# Altium PCB GRAVITAS_XTREME_SENSOR.PcbDoc
Units mil, origin at the board's own origin, x right, y up, seen from the top; angles counter-clockwise.
Board outline 1575 x 5595 mil, 4 copper layers (Top Layer, Layer 1, Layer 2, Bottom Layer), stack 23.756 mil thick; 62 components, 34 nets, 225 pads, 90 vias.
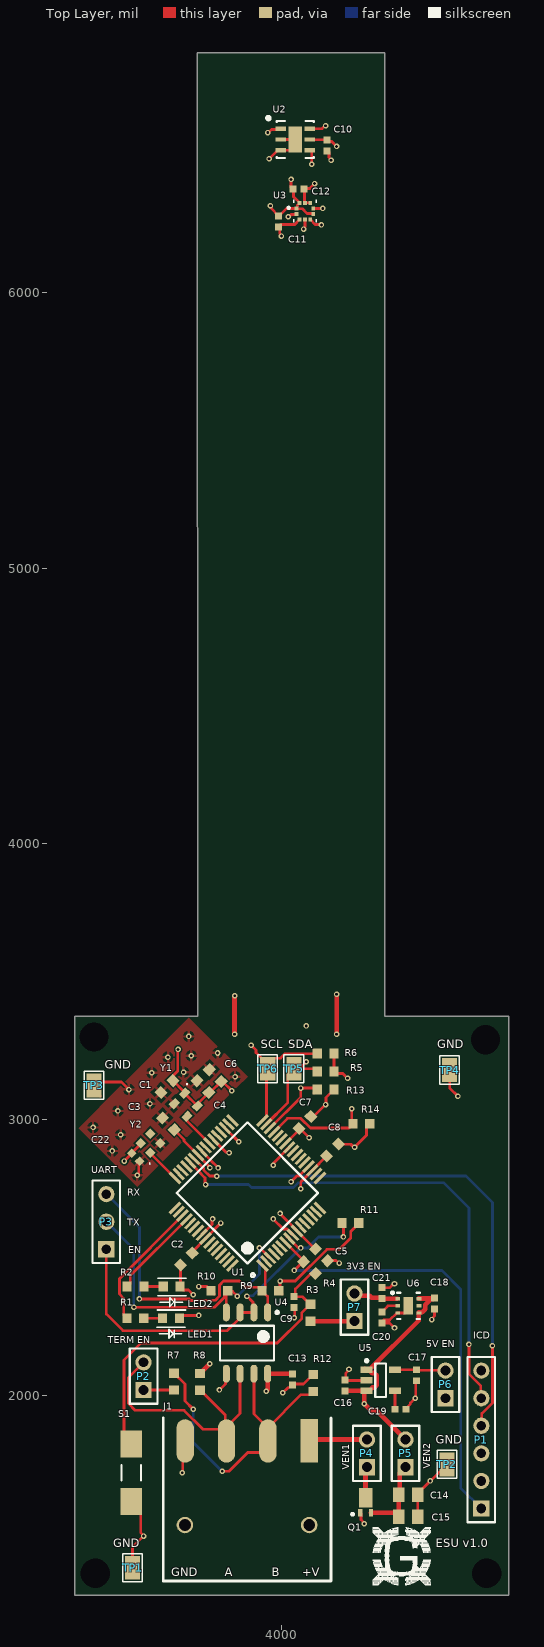
[diagram p0: Top Layer view]
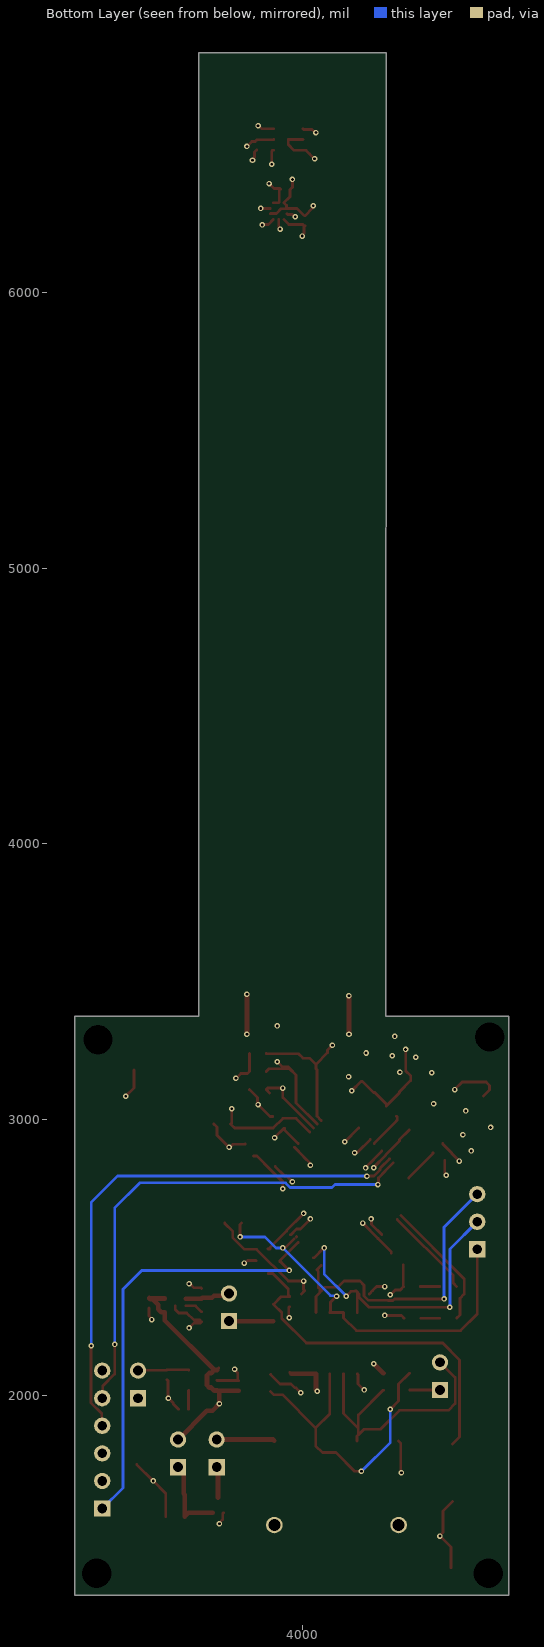
[diagram p1: Bottom Layer view, seen from below]
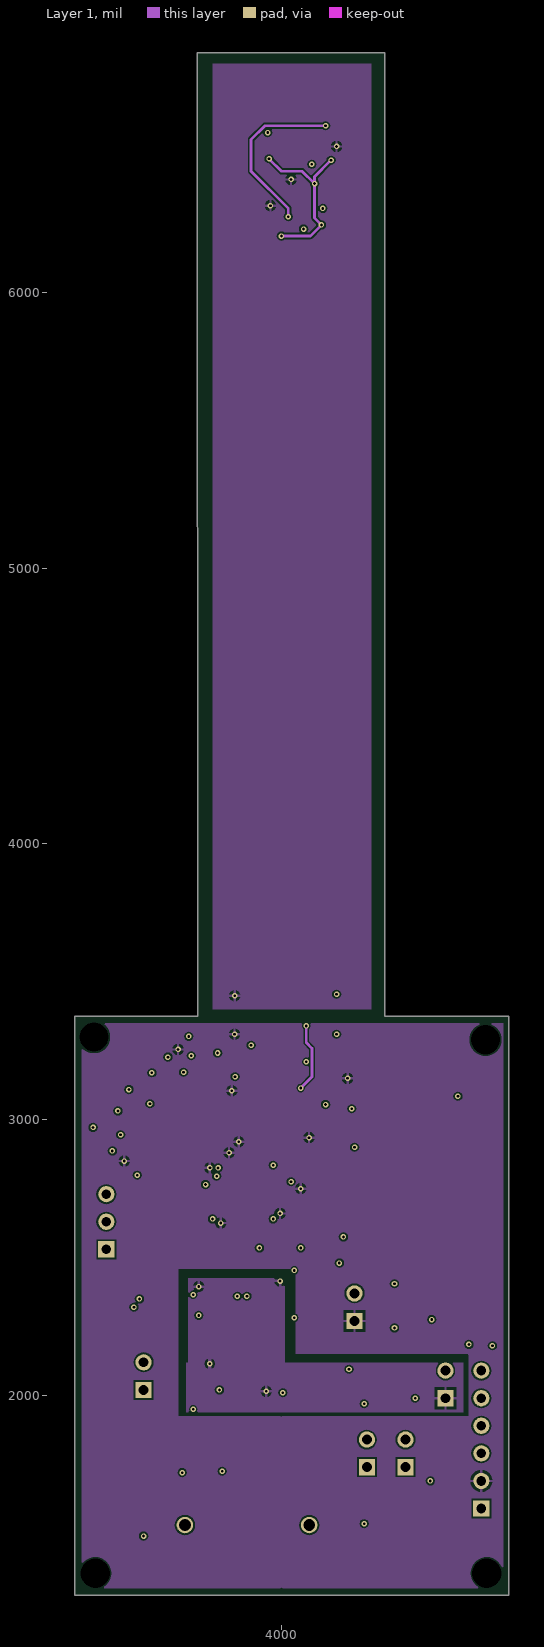
[diagram p2: Layer 1]
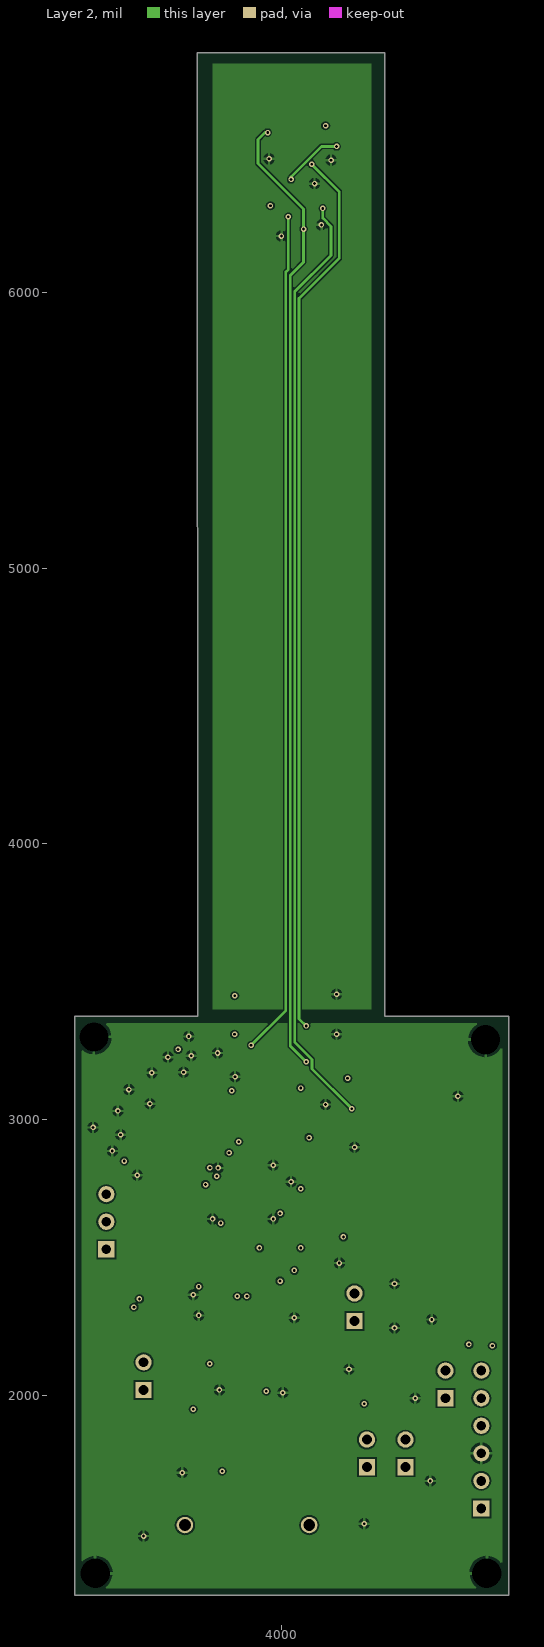
[diagram p3: Layer 2]

## Layer stack, top to bottom
Top Solder: solder mask 0.4, Solder Resist, Dk 3.5
Top Layer: signal copper 1.4
Dielectric 2: prepreg 2.8, PP-006, Dk 4.1
Layer 1: signal copper 1.3779
Dielectric 1: dielectric 12.6, FR-4, Dk 4.8
Layer 2: signal copper 1.3779
Dielectric 3: prepreg 2.8, PP-006, Dk 4.1
Bottom Layer: signal copper 1.4
Bottom Solder: solder mask 0.4, Solder Resist, Dk 3.5

## Board outline
3250,1275 3250,3375 3696.96,3375 3696.96,3426.96 3695,6870 4375,6870 4375,3420 4375,3375 4825,3375 4825,1275

## Design rules (kind name [scope] priority, off if disabled: settings)
Clearance [All] p1: gap=6 ignorepadtopadclearanceinfootprint=FALSE except(0: Arc-Hole Track-Hole SMDPad-Hole THPad-Hole Via-Hole Fill-Hole Poly-Hole Region-Hole Text-Hole; 4: SMDPad-SMDPad)
PolygonConnect [All] p1: connectstyle=Relief reliefconductorwidth=10 reliefentries=4 polygonreliefangle="90 Angle" airgapwidth=10
RoutingVias [All] p1: holewidth=10 width=20 viastyle="Through Hole" minholewidth=10 minwidth=20 maxholewidth=50 maxwidth=60
SolderMaskExpansion [All] p1: expansion=4
Width [All] p1: maxlimit=17 minlimit=6 preferedwidth=10 midlayer1_minwidth=10 midlayer1_maxwidth=10 midlayer2_minwidth=10 midlayer2_maxwidth=10 minimp=50.000000 maximp=50.000000 favimp=50.000000
30 further rules are at their usual default settings.

## Classes and differential pairs
component class VREG_RS485_XS: C13 C14 C15 C16 C17 C18 C19 C20 C21 J1 P2 P3 P4 P5 P6 P7 Q1 R7 R8 R9 R10 R11 R12 TP1 TP2 TP3 TP4 U4 U5 U6
component class SENSORS_XS: C10 C11 C12 R5 R6 R13 R14 TP5 TP6 U1 U2 U3
component class MCU_SUPPORT_XS: C1 C2 C3 C4 C5 C6 C7 C8 C9 C22 LED1 LED2 P1 R1 R2 R3 R4 S1 Y1 Y2

## Components (designator, comment, footprint, x,y, rotation, side; value= is the part's Value field where it differs from the comment)
C1 "0.1uF" NonPolar-0603 3585,3120 r45 top
C2 "0.1uF" NonPolar-0603 3655,2495 r45 top
C3 "0.1uF" NonPolar-0603 3590,2985 r315 top
C4 "0.1uF" NonPolar-0603 3715,3120 r315 top
C5 "0.1uF" NonPolar-0603 4145,2510 r135 top
C6 "0.1uF" NonPolar-0603 3760,3160 r315 top
C7 "0.1uF" NonPolar-0603 4085,2990 r225 top
C8 "0.1uF" NonPolar-0603 4185,2890 r225 top
C9 "100nF" NonPolar-0402 4045,2340 r90 top
C10 "0.1uF" NonPolar-0402 4165,6535 r90 top
C11 "100nF" NonPolar-0402 3990,6260 r90 top
C12 "100nF" NonPolar-0402 4060,6375 r180 top
C13 "0.1uF" NonPolar-0402 4040,2060 r90 top
C14 "10uF" NonPolar-0805 4460,1640 r180 top
C15 "10uF" NonPolar-0805 4460,1560 r180 top
C16 "1uF" NonPolar-0402 4230,2035 r270 top
C17 "4.7uF" NonPolar-0402 4490,2075 r90 top
C18 "1uF" NonPolar-0402 4555,2335 r90 top
C19 "10nF" NonPolar-0402 4430,1950 r180 top
C20 "0.01uF" NonPolar-0402 4365,2285 r90 top
C21 "2.2uF" NonPolar-0402 4365,2370 r270 top
C22 "0.1uF" NonPolar-0402 3470,2865 r135 top
J1 "1824653" 1824653 4100.79,1835.12 r180 top
LED1 "LED-0603" LED-0603 3597.52,2280 r0 top
LED2 "LED-0603" LED-0603 3600,2395 r0 top
P1 "Header 6" HDR1X6 4725,1590 r90 top
P2 "Header 2" HDR1X2 3500,2020 r90 top
P3 "Header 3" HDR1X3 3365,2530 r90 top
P4 "Header 2" HDR1X2 4310,1740 r90 top
P5 "Header 2" HDR1X2 4450,1740 r90 top
P6 "Header 2" HDR1X2 4595,1990 r90 top
P7 "Header 2" HDR1X2 4265,2270 r90 top
Q1 "P_Channel_DMG3415UFY4Q-7" P_Channel_DMG3415UFY4Q-7_attempt1 4305,1610 r90 top
R1 "220R" NonPolar-0603 3470,2280 r0 top
R2 "220R" NonPolar-0603 3470.51,2395 r0 top
R3 "10k" NonPolar-0603 4105,2300 r270 top
R4 "220R" NonPolar-0603 4101.58,2463.42 r315 top
R5 "5k" NonPolar-0603 4160.51,3175 r0 top
R6 "5k" NonPolar-0603 4160.51,3240 r0 top
R7 "120R" NonPolar-0603 3610,2050 r90 top
R8 "20k" NonPolar-0603 3705,2049.49 r90 top
R9 "10k" NonPolar-0603 3960,2380 r0 top
R10 "10k" NonPolar-0603 3775,2380 r180 top
R11 "10k" NonPolar-0603 4250,2625 r0 top
R12 "20k" NonPolar-0603 4115,2045 r270 top
R13 "10k" NonPolar-0603 4160.51,3110 r180 top
R14 "10k" NonPolar-0603 4290,2985 r180 top
S1 "Switch-147873-1" "Switch - 147873-1" 3455,1719.33 r270 top
TP1 "TestPoint" "TP - S2751-46R" 3460,1375 r90 top
TP2 "TestPoint" "TP - S2751-46R" 4600,1750 r90 top
TP3 "TestPoint" "TP - S2751-46R" 3320,3124.25 r90 top
TP4 "TestPoint" "TP - S2751-46R" 4610,3180 r90 top
TP5 "TestPoint" "TP - S2751-46R" 4045,3185 r90 top
TP6 "TestPoint" "TP - S2751-46R" 3950,3185 r90 top
U1 "PIC32MK0512GPD064-I/PTX" V2_PIC32MK0512GPD064IPT 3876.59,2734.36 r135 top
U2 "HDC2080" HDC2080 4050,6555 r0 top
U3 "BMP388" BMP388 4085.12,6295.16 r0 top
U4 "MAX485CSA+" MAXM-MAX485CSA+-8_M 3875,2190 r270 top
U5 "5V_LDO_LP2992IM5-5.0/NOPB" LP2992IM5-5.0/NOPB 4360,2055 r0 top
U6 "3V3_LDO_TPS73533" TPS73533DRVT 4460,2325 r0 top
Y1 "12MHz_DSC1001DE2-012.0000" 12MHz_DSC1001DE2-012.0000 3653.24,3054.18 r315 top
Y2 "32.768kHz_DSC6083JE2A-032K768" 32.768kHz_DSC6083JE2A-032K768 3586.25,2918.97 r45 top

## Footprints (in the part's own frame and the unit in brackets; to place one, negate y for a bottom-side part, rotate by r counter-clockwise, add the part's x,y. Pads: shape width x height; smd on the part's side, far side on the other; paste and mask are expansions set on the pad)
12MHz_DSC1001DE2-012.0000 [mm]
  rect 0.65x0.85 smd: 1(-0.825,0.675) 2(-0.825,-0.675) 3(0.825,-0.675) 4(0.825,0.675)
  silkscreen extent -1.32,1.38 -1.23,1.47, body extent -1.28,-1.02 1.27,1.03, height 0.9
32.768kHz_DSC6083JE2A-032K768 [mm]
  rect 0.7x0.7 smd: 1(-1.8,0.4) 2(-0.55,0.4) 3(-0.55,1.65) 4(-1.8,1.65)
  silkscreen extent -2.59,-0.3 -2.49,-0.2, body extent -2.42,0.02 0.08,2.02, height 0.89
1824653 [mm]
  rect 1.6x4 smd: 1(0,0)
  oval 1.6x4 smd: 2(3.81,0) 3(7.62,0) 4(11.43,0)
  round 1.524 hole 1.1: 5(0,7.75) 6(11.45,7.75)
  silkscreen extent -2,-2.1 13.45,12.9, body extent -1.98,-2.21 13.45,12.96, height 7.7
BMP388 [mm]
  rect 0.35x0.38 smd: 1(-0.765,0.25) 2(-0.765,-0.25) 3(-0.5,-0.765) 4(0,-0.765) 5(0.5,-0.765) 6(0.765,-0.25) 7(0.765,0.25) 8(0.5,0.765) 9(0,0.765) 10(-0.5,0.765)
  silkscreen extent -1.6,-1.03 1.03,1.03
HDC2080 [mm] "SON, 6-Leads, Body 3.00x3.00mm, Pitch 1.00mm, Thermal Pad 2.40x1.28mm, IPC Medium Density"
  rect 1x0.4 smd: 1(-1.34,1) 2(-1.34,0) 3(-1.34,-1) 4(1.34,-1) 5(1.34,0) 6(1.34,1)
  rect 1.28x2.4 smd: 7(0,0)
  silkscreen extent -2.67,-1.7 1.7,2.17, body extent -1.55,-1.55 1.55,1.55, height 0.8
HDR1X2 [mm] "Connector; Header; 2 Position"
  rect 1.5x1.5 hole 0.9: 1(0,0)
  round 1.5 hole 0.9: 2(2.54,0)
  silkscreen extent -1.27,-1.27 3.81,1.27
HDR1X3 [mm] "Connector; Header; 3 Position"
  rect 1.5x1.5 hole 0.9: 1(0,0)
  round 1.5 hole 0.9: 2(2.54,0) 3(5.08,0)
  silkscreen extent -1.27,-1.27 6.35,1.27
HDR1X6 [mm] "Connector; Header; 6 Position"
  rect 1.5x1.5 hole 0.9: 1(0,0)
  round 1.5 hole 0.9: 2(2.54,0) 3(5.08,0) 4(7.62,0) 5(10.16,0) 6(12.7,0)
  silkscreen extent -1.27,-1.27 13.97,1.27
LED-0603 [mm]
  rect 0.85x0.9 smd: 1(-0.725,0) 2(0.825,0)
  silkscreen extent -1.24,-1.84 1.39,0.76, body extent -0.8,-0.45 0.9,0.45, height 0.6
LP2992IM5-5.0/NOPB [mm]
  rect 1.1x0.6 smd: 1(-1.3,0.95) 2(-1.3,0) 3(-1.3,-0.95) 4(1.3,-0.95) 5(1.3,0.95)
  silkscreen extent -1.42,-1.55 0.5,1.92, body extent -0.87,-1.52 0.87,1.53, height 1.45
MAXM-MAX485CSA+-8_M [mm] "SOIC, 8-Leads, Body 5x4mm, Pitch 1.27mm, IPC Low Density"
  oval 1.65x0.65 smd: 1(-2.825,1.905) 2(-2.825,0.635) 3(-2.825,-0.635) 4(-2.825,-1.905) 5(2.825,-1.905) 6(2.825,-0.635) 7(2.825,0.635) 8(2.825,1.905)
  silkscreen extent -2.95,-2.5 1.6,2.91, body extent -2,-2.5 2,2.5, height 1.75
NonPolar-0402 [mm]
  rect 0.64x0.64 smd: 1(-0.55,0) 2(0.46,0)
  body extent -0.55,-0.3 0.55,0.3, height 0.7
NonPolar-0603 [mm] "Chip Resistor, 2-Leads, Body 1.60x0.80mm, IPC Medium Density"
  rect 0.85x0.9 smd: 1(-0.775,0) 2(0.775,0)
  body extent -0.85,-0.45 0.85,0.45, height 0.6
NonPolar-0805 [mm] "Chip Resistor, 2-Leads, Body 2.00x1.20mm, IPC Medium Density"
  rect 1.05x1.3 smd: 1(-0.875,0) 2(0.875,0)
  body extent -1.05,-0.65 1.05,0.65, height 0.6
P_Channel_DMG3415UFY4Q-7_attempt1 [mm] "DFN, 3-Leads, Body 1.51x2.01mm, Pitch 1.40mm, IPC Medium Density"
  rect 0.65x0.4 smd: 1(-0.9,0.5) 2(-0.9,-0.5)
  rect 1.8x1.25 smd: 3(0.5,0)
  silkscreen extent -1.18,1.01 -0.91,1.32, body extent -1.04,-0.79 1.04,0.79, height 0.4
"Switch - 147873-1" [mm]
  rect 2.5x2 smd: 1(-2.65,0) 2(2.65,0)
  silkscreen extent -0.7,-0.9 0.7,0.9, body extent -3.8,-1.05 3.8,1.05, height 3
"TP - S2751-46R" [mm]
  rect 2.2x1.4 smd: 1(0,0)
  silkscreen extent -1.29,-0.89 1.3,0.91, body extent -1,-0.6 1,0.6, height 1.4
TPS73533DRVT [mm]
  rect 0.45x0.3 smd: 1(-0.975,0.65) 2(-0.975,0) 3(-0.975,-0.65) 4(0.975,-0.65) 5(0.975,0) 6(0.975,0.65)
  rect 0.89x1.6 smd: 7(0,0)
  silkscreen extent -1.58,-1.2 1.05,1.33, body extent -1.05,-1.05 1.05,1.05, height 0.8
V2_PIC32MK0512GPD064IPT [mm]
  rect 1.4x0.3 smd: 1(-5.7,3.75) 2(-5.7,3.25) 3(-5.7,2.75) 4(-5.7,2.25) 5(-5.7,1.75) 6(-5.7,1.25) 7(-5.7,0.75) 8(-5.7,0.25) 9(-5.7,-0.25) 10(-5.7,-0.75) 11(-5.7,-1.25) 12(-5.7,-1.75) 13(-5.7,-2.25) 14(-5.7,-2.75) 15(-5.7,-3.25) 16(-5.7,-3.75) 33(5.7,-3.75) 34(5.7,-3.25) 35(5.7,-2.75) 36(5.7,-2.25) 37(5.7,-1.75) 38(5.7,-1.25) 39(5.7,-0.75) 40(5.7,-0.25) 41(5.7,0.25) 42(5.7,0.75) 43(5.7,1.25) 44(5.7,1.75) 45(5.7,2.25) 46(5.7,2.75) 47(5.7,3.25) 48(5.7,3.75)
  rect 0.3x1.4 smd: 17(-3.75,-5.7) 18(-3.25,-5.7) 19(-2.75,-5.7) 20(-2.25,-5.7) 21(-1.75,-5.7) 22(-1.25,-5.7) 23(-0.75,-5.7) 24(-0.25,-5.7) 25(0.25,-5.7) 26(0.75,-5.7) 27(1.25,-5.7) 28(1.75,-5.7) 29(2.25,-5.7) 30(2.75,-5.7) 31(3.25,-5.7) 32(3.75,-5.7) 49(3.75,5.7) 50(3.25,5.7) 51(2.75,5.7) 52(2.25,5.7) 53(1.75,5.7) 54(1.25,5.7) 55(0.75,5.7) 56(0.25,5.7) 57(-0.25,5.7) 58(-0.75,5.7) 59(-1.25,5.7) 60(-1.75,5.7) 61(-2.25,5.7) 62(-2.75,5.7) 63(-3.25,5.7) 64(-3.75,5.7)
  silkscreen extent -5.85,-4.6 4.6,5.15, body extent -5,-5 5,5, height 1

## Part data
C1 C2 C3 C4 C5 C6 C7 C8: library part "Cap - 0603"
C9 C10 C11 C12 C13 C16 C17 C18 C19 C20 C21 C22: library part "Cap - 0402"
C14 C15: library part "Cap - 0805"
P1: "Header, 6-Pin", LatestRevisionDate=17-Jul-2002, LatestRevisionNote="Re-released for DXP Platform.", Publisher="Altium Limited"
P2 P4 P5 P6 P7: "Header, 2-Pin", LatestRevisionDate=17-Jul-2002, LatestRevisionNote="Re-released for DXP Platform.", Publisher="Altium Limited"
P3: "Header, 3-Pin", LatestRevisionDate=17-Jul-2002, LatestRevisionNote="Re-released for DXP Platform.", Publisher="Altium Limited"
R1 R2 R3 R4 R5 R6 R7 R8 R9 R10 R11 R12 R13 R14: library part "Res - 0603"
TP1 TP2 TP3 TP4 TP5 TP6: "S2751-46R"
U4: library part CMP-2000-05211-1, "Low-Power, Slew-Rate-Limited RS-485/RS-422 Transceiver, 4.75 to 5.25 V, 0 to 70 degC, 8-Pin SOIC, RoHS, Tape and Reel", Digital IC Case Style=SOIC, IC Temperature Range=Commercial, Manufacturer=Maxim, Operating Temperature Max=70degC, Operating Temperature Min=0degC, Operating Temperature Range=0degCto+70degC, Supply Current=500µA, Supply Voltage Max=5.25V, Supply Voltage Min=4.75V, Supply Voltage Range=4.75Vto5.25V, Base Number=485, Data Rate=2.5Mbps, Datasheet URL=https://datasheet.ciiva.com/29306/170071-da-01-en-ic-max485csa-so8-29306144.pdf, Datasheet Version="Rev. 8, 10/2003", Device Marking=MAX485CSA+, Device Type=Transceiver, Driver Case Style=SOIC, IC Generic Number=485, Interface=RS-422/RS-485, Interface Type=RS422,RS485, Line / Bus Driver / Receiver / Transceiver Type=CMOSDifferential, Logic Function Number=485, Manufacturer URL=http://www.maximintegrated.com/, No. of Drivers=1, No. of Pins=8, No. of Receivers=1, Package / Case=SOIC, Transceiver Type=Differential

## Free pads (board coordinates)
  round 60 hole 106.3: 8(3320,3300) 9(4740,3290) 10(4745,1355) 11(3325,1355)

## Via types
v1: diameter 20, hole 10, Top Layer to Bottom Layer, 90 vias

## Nets (pads, with @x,y where several pads share a name; then routed paths per layer and width w, separated by ;. In a path a pad name is that pad's centre, name@x,y a point inside that pad or via, vN(x,y) a via of type N, cw(c..) or ccw(c..) an arc to the next point about the centre after c; other vN are vias at no path point)
3V3DC: C1.2 C2.2 C3.2 C4.2 C5.2 C6.2 C7.2 C8.2 C10.2 C11.2 C12.2 C22.2 P1.2 P7.1 R3.2 R5.2 R6.2 U1.10 U1.19 U1.26 U1.35 U1.38 U1.42 U1.57 U2.5 U3.1 U3.6 U3.10 Y1.1 Y1.4 Y2.4 | length 2588.2
  Top Layer w10: v1(3430,2850) 3457.19,2877.19 C22.2 3457.19,2879.8 3490.2,2912.81 Y2.4 ; C3.2 3646.47,2928.53 3646.47,2922.73 U1.42 3697.03,2870.88 3740.42,2827.49 v1(3740.42,2825.42) ; v1(3625,3255) 3624.07,3254.07 3624.07,3177.06 3605.88,3158.86 3605.88,3142.27 C1.2 3646.58,3101.58 Y1.1@3646.58,3098.42 ; Y1.1 Y1.4 3695,3056.85 C4.2 3741.58,3098.42 C6.2 3786.58,3138.42 v1(3820,3105) ; C2.2 3676.58,2520.42 U1.57 3724.87,2569.87 v1(3780,2625) ; U1.38 3798.64,2881.91 3808.09,2881.91 v1(3810,2880) ; U1.35 3795.4,2969.6 v1(3845,2920) ; v1(3960,6315) 3961.91,6313.09 3961.91,6306.2 C11.2 ; v1(3995,2660) 3995,2658.86 4056.15,2597.7 U1.10 4116.14,2536.58 4116.14,2531.58 C5.2 C5.2@4124.12,2532.27 ; C11.2@3995,6281.22 4018.78,6305 U3.1 ; U1.26 4063.42,2962.95 C7.2 4066.58,2968.42 v1(4100,2935) ; v1(4035,6410) 4035,6381.89 C12.2 4043.9,6372.99 4043.9,6347.4 4065.43,6325.87 U3.10 4065.43,6324.69 4056.89,6316.14 4056.89,6306.89 U3.1 ; v1(4070,2750) 4070.35,2750.35 4070.35,2775 U1.19 C8.2@4163.42,2868.08 ; U2.5 4103.7,6554.06 4164.06,6554.06 C10.2 4170.43,6547.68 4182.32,6547.68 v1(4200,6530) ; R3.2 R3.2@4105.51,2270 ; U3.6 4114.03,6286.52 4093.35,6286.52 4076.07,6303.8 4056.2,6303.8 U3.1 ; C8.2@4164.12,2867.38 C8.2@4163.42,2868.08 ; C8.2@4176.58,2868.42 C8.2 C8.2@4163.42,2868.08 ; R6.2 R5.2 4198.35,3167.68 4222.32,3167.68 v1(4240,3150) ; P7.1@4240.47,2294.53 P7.1
  Top Layer w17: v1(3830,3310) 3830,3449.19 v1(3830.31,3449.5) ; R3.2 4264.49,2269.49 P7.1
  Layer 2 w10: v1(4035,6410) 4035,6419.7 4145.3,6530 v1(4200,6530) v1@4201,6529
5VDC: C13.2 P6.1 R8.2 R9.2 R10.2 R11.2 U4.8 | length 721.7
  Top Layer w10: v1(3700,2395) 3729.49,2395 3731.77,2392.72 3732.76,2392.72 3744.49,2380.98 R10.2 R10.2@3756.22,2368.27 ; R8.2 R8.2@3705.98,2080 ; R9.2@4002.24,2368.27 R9.2 3995,2384.49 v1(3995,2415) 4050,2415 4165,2530 4209.7,2530 4251.24,2571.54 4251.24,2594.74 4280.51,2624.02 R11.2 ; C13.2 C13.2@4045,2083.11
  Top Layer w17: R8.2 v1(3740,2115) ; v1(3945,2015) 3945,2015.81 3949.99,2020.8 U4.8 ; U4.8 3950.33,2078.45 4039.67,2078.45 C13.2
6V5DC: C16.2 C18.2 P5.2 U5.1 U5.3 U6.4 U6.6 | length 890.5
  Top Layer w10: U5.1@4302.01,2099.21 U5.1
  Top Layer w17: C16.2 4230.35,2017.24 U5.3@4303.53,2017.24 ; U5.3@4306.46,2017.24 U5.3@4303.53,2017.24 ; U5.3 4318.66,2017.6 4329.75,2028.69 4336.48,2028.69 4344.97,2037.18 4344.97,2072.82 4336.48,2081.31 4329.75,2081.31 U5.1@4318.66,2092.4 ; U5.1 U5.1@4318.66,2092.4 ; P5.2 4345.1,1944.9 4325.1,1944.9 v1(4300,1970) 4300.57,1970.57 4300.57,2014.29 U5.3@4303.53,2017.24 ; U6.6 4498.39,2351.49 4498.74,2351.85 C18.2@4553.74,2351.85 ; C18.2 C18.2@4553.74,2351.85 ; U5.1@4318.66,2092.4 4498.03,2271.77 4498.03,2299.05 U6.4 4498.39,2301.65 4498.74,2302 4510.66,2302 4521.74,2313.09 4521.74,2329.34 4541.42,2349.01 4550.9,2349.01 C18.2@4553.74,2351.85
+V: P4.1 Q1.3 | length 119.5
  Top Layer w10: Q1.3 Q1.3@4310,1634.68
  Top Layer w17: Q1.3 4305,1735 P4.1
GND: C1.1 C2.1 C3.1 C4.1 C5.1 C6.1 C7.1 C8.1 C9.1 C10.1 C11.1 C12.1 C13.1 C14.1 C15.1 C16.1 C17.1 C18.1 C19.1 C20.1 C21.1 C22.1 J1.4 LED1.2 LED2.2 P1.3 pad.8 pad.9 pad.10 pad.11 Q1.1 R12.1 R13.1 R14.1 S1.2 TP1.1 TP2.1 TP3.1 TP4.1 U1.9 U1.20 U1.25 U1.41 U1.56 U2.2 U2.3 U2.7 U3.3 U3.5 U3.8 U3.9 U4.5 U5.2 U6.3 U6.7 Y1.2 Y2.2 | length 4109.5
  Top Layer w10: TP3.1@3342.56,3085.94 3320,3108.5 TP3.1 3332.44,3136.69 3419.43,3136.69 v1(3446.76,3109.36) ; S1.2 3489.37,1580.63 3489.37,1503.34 3500,1492.71 v1(3500,1490) 3460,1450 TP1.1 ; v1(3477.01,2798.85) 3477.01,2801.55 3482.81,2807.35 C22.1@3482.81,2852.19 ; LED1.2 3640,2290 v1(3700,2290) ; C2.1 3633.42,2395.35 3632.48,2394.41 3644.21,2382.68 3662.32,2382.68 v1(3680,2365) ; v1(3640,1720) 3641.91,1721.91 3641.91,1826.24 J1.4 ; U1.56 3748.09,2619.77 3748.09,2638.09 v1(3750,2640) ; U1.41 3741.05,2855.99 3741.05,2854.97 3770,2826.02 v1(3770,2825) ; v1(3775,2020) 3797.02,2042.02 3797.02,2075.8 U4.5 ; v1(3955,6485) 3972.68,6502.68 3972.68,6502.87 3985.43,6515.63 U2.3 4029.8,6515.63 4050,6535.83 U2.7 U2.2 ; v1(3970,2640) 4006.62,2603.38 4020.21,2603.38 4040.95,2582.64 U1.9 ; v1(3970,2835) 3971.91,2836.91 3971.91,2842.32 3993.52,2863.92 3993.52,2865.2 U1.25 ; C11.1@3990,6241.89 3993.41,6238.48 3993.41,6214.29 4000,6207.71 v1(4000,6205) ; C11.1@3995,6245 3997.11,6247.11 4048.09,6247.11 4065.43,6264.45 U3.3 ; v1(4005,2010) 4022.68,2027.68 4025.79,2027.68 4040,2041.89 4080.39,2041.89 4114.02,2075.51 R12.1 ; v1(4035,2775) 4055.6,2795.6 4063.11,2795.6 U1.20 ; C9.1@4045,2321.89 4048.41,2318.48 4048.41,2283.41 v1(4046.71,2281.71) ; U3.5 4104.8,6264.45 4122.34,6246.91 4143.09,6246.91 v1(4145,6245) ; U3.8 U3.9 4083.32,6327.07 4083.32,6369.79 4078.11,6375 4080.43,6377.32 4102.32,6377.32 v1(4120,6395) ; C7.1 4116.58,3011.58 v1(4160,3055) 4161.91,3056.91 4161.91,3079.91 4191.02,3109.02 R13.1 ; C10.1@4165,6516.89 4172.6,6509.29 4172.6,6490.11 4180,6482.71 v1(4180,6480) ; C5.1 4167.27,2489.12 4198.17,2489.12 4207.29,2480 v1(4210,2480) ; C8.1 4207.27,2910.88 4251.41,2910.88 4262.29,2900 v1(4265,2900) 4308.78,2943.78 4308.78,2973.27 R14.1 ; C16.1@4230,2053.11 C16.1@4230.94,2054.06 ; v1(4245,2095) 4245,2092.29 4233.41,2080.71 4233.41,2056.52 C16.1@4230.94,2054.06 ; Q1.1 4288.19,1571.69 4288.19,1549.52 4300,1537.71 v1(4300,1535) ; U5.2 4307.87,2054.06 C16.1@4230.94,2054.06 ; C21.1@4365,2388.11 4367.19,2390.3 4392.6,2390.3 4407.29,2405 v1(4410,2405) ; v1(4410,2245) 4392.32,2262.68 4369.21,2262.68 4365,2266.89 4371.46,2273.35 4392.6,2273.35 4418.66,2299.41 U6.3 4447.48,2299.41 4460,2311.93 U6.7 ; C19.1@4448.11,1950 4467.32,1969.21 4467.32,1972.32 v1(4485,1990) 4486.91,1991.91 4486.91,2053.8 C17.1@4490,2056.89 ; C15.1 C14.1 4494.45,1644.92 4539.53,1690 v1(4540,1690) TP2.1 ; v1(4545,2275) 4545,2277.71 4555,2287.71 C18.1@4555,2316.89 ; TP4.1 4610,3115 v1(4640,3085)
  Top Layer w17: v1(4200,3310) v1(4200,3455)
  Layer 1 w10: v1(3955,6485) 4000,6440 4075,6440 v1(4120,6395) ; v1(4000,6205) 4105,6205 v1(4145,6245) 4120,6270 v1(4120,6395) ; v1(4180,6480) 4120,6420 v1(4120,6395)
  other v1: 3386.76,2886.96 3416.72,2945.38 3316.76,2971.96 3406.76,3031.96 3523.21,3057.78 3831.76,3155.97 3530,3170 3645.07,3171.96 3588.17,3226.96 3672.91,3231.96 3768.32,3241.96 3663.72,3301.96
NetC9_2: C9.2 R3.1 R4.2 S1.1 | length 1284.3
  Top Layer w10: S1.1 3429,1849.66 3429,2129 3490,2190 3984.7,2190 4073.84,2279.15 4073.84,2300.34 R3.1@4104.02,2330.51 ; R3.1 R3.1@4104.02,2330.51 ; R4.2 4106.56,2441.85 4050.42,2385.71 4050.42,2363.53 C9.2 4049.66,2358.11 4076.42,2358.11 R3.1@4104.02,2330.51
NetC14_2: C14.2 C15.2 P5.1 Q1.2 | length 296
  Top Layer w17: Q1.2 4413.38,1574.57 C15.2@4425.55,1562.4 ; C15.2 C15.2@4425.55,1562.4 ; P5.1 4428.97,1718.97 4428.97,1643.42 C14.2 C15.2@4425.55,1562.4
NetC17_2: C17.2 P6.2 U5.5 | length 185.4
  Top Layer w10: U5.5 4411.54,2092.76 4489.65,2092.76 C17.2 4491.56,2091.56 4593.44,2091.56 P6.2
NetC19_2: C19.2 U5.4 | length 67.9
  Top Layer w10: U5.4 4411.89,2016.89 C19.2
NetC20_2: C20.2 U6.2 | length 65.7
  Top Layer w10: C20.2 4386.89,2325 U6.2
NetC21_2: C21.2 P7.2 U6.1 | length 178.1
  Top Layer w10: P7.2 P7.2@4278.27,2370
  Top Layer w17: P7.2 4273.05,2361.95 4319.68,2361.95 4326.9,2354.73 4362.16,2354.73 C21.2 4365.65,2351.24 4421.26,2351.24 4421.61,2350.88 U6.1
NetJ1_1: J1.1 P4.2 | length 211.2
  Top Layer w17: J1.1 4105.67,1840 P4.2
NetJ1_2: J1.2 R7.2 R12.2 U4.7 | length 1134
  Top Layer w10: R7.2 3610.98,2080.51 3650.4,2041.09 3650.4,1979.6 v1(3680,1950) ; v1(3785,1725) 3810,1725 3877.87,1792.87 3926.31,1792.87 3950.79,1817.35 J1.2 J1.2@3950.79,1882.36 ; U4.7 3900,1933.15 J1.2@3950.79,1882.36 ; R12.2 4103.27,2002.76 4071.18,2002.76 J1.2@3950.79,1882.36
  Bottom Layer w10: v1(3680,1950) 3680,1830 v1(3785,1725)
NetJ1_3: J1.3 P2.2 R8.1 U4.6 | length 1007.4
  Top Layer w10: P2.2 3445,2065 3445,1970.86 3469.86,1946 3647.25,1946 3715.89,1877.36 3776.31,1877.36 J1.3@3796.1,1857.57 ; R8.1 3705.98,2018.98 3796.1,1928.86 3796.1,1885.79 J1.3@3796.1,1857.57 ; J1.3 3800.79,1852.88 J1.3@3796.1,1857.57 ; J1.3@3800.79,1885.79 3850,1935 U4.6
NetLED1_1: LED1.1 R1.2 | length 68.5
  Top Layer w10: R1.2 LED1.1
NetLED2_1: LED2.1 R2.2 | length 70.4
  Top Layer w10: R2.2 LED2.1
NetP1_1: P1.1 R4.1 U1.7 | length 1604.2
  Top Layer w10: U1.7 4080,2489.19 R4.1 R4.1@4078.15,2485 ; v1(4046.58,2453.42) R4.1@4078.15,2485 ; R4.1@4075.3,2485 R4.1@4078.15,2485
  Bottom Layer w10: v1(4046.58,2453.42) 4581.58,2453.42 4650,2385 4650,1665 P1.1
NetP1_4: P1.4 U1.43 | length 1978.3
  Top Layer w10: U1.43 3713.21,2828.15 3717.91,2823.44 3717.91,2818.23 3740,2796.14 3763.86,2796.14 v1(3765,2795) ; P1.4 4726.84,1891.84 4726.84,1934.53 4765.53,1973.21 4765.53,2179.47 v1(4765,2180)
  Bottom Layer w10: v1(3765,2795) 3766,2796 4669,2796 4765,2700 v1(4765,2180)
NetP1_5: P1.5 U1.44 | length 1815.4
  Top Layer w10: U1.44 3699.29,2814.23 3699.29,2812.95 3723.09,2789.15 3723.09,2766.91 v1(3725,2765) ; v1(4680,2185) 4680,2077.69 4723.16,2034.53 4723.16,1991.84 P1.5
  Bottom Layer w10: v1(3725,2765) 3880.5,2765 3891.5,2754 4043.7,2754 4060.7,2771 4589,2771 4680,2680 v1(4680,2185)
NetP2_1: P2.1 R7.1 | length 110.2
  Top Layer w10: P2.1 3500.51,2019.49 R7.1
NetP3_1: P3.1 R11.1 U1.8 U4.2 U4.3 | length 1451
  Top Layer w10: P3.1 3365,2295 3425,2235 3803.46,2235 3850,2281.54 U4.3 U4.2 3897.02,2304.2 3897.02,2337.98 v1(3875,2360) ; U1.8@4020,2575 U1.8@4020,2576.02 ; U1.8 4060.12,2536.91 4068.09,2536.91 v1(4070,2535) ; R11.1 4225,2619.49 v1(4225,2575)
  Bottom Layer w10: v1(3875,2360) 3876.91,2361.91 3896.91,2361.91 v1(4070,2535) 4095,2535 4135,2575 v1(4225,2575)
NetP3_2: P3.2 R10.1 U1.3 U4.4 | length 1103.1
  Top Layer w10: v1(3465,2320) 3757.63,2320 3793.78,2356.15 3793.78,2368.27 R10.1@3800,2374.49 ; U4.4 R10.1@3800,2374.49 ; v1(3840,2360) 3822.32,2377.68 3807.83,2377.68 R10.1 R10.1@3800,2374.49 ; v1(3920,2535) 3921.56,2535 3957.44,2499.12 U1.3
  Layer 2 w10: P3.2 P3.2@3366,2629
  Bottom Layer w10: P3.2 3464,2531 3464,2321 v1(3465,2320) ; v1(3840,2360) 3920,2440 v1(3920,2535)
NetP3_3: P3.3 R9.1 U1.1 U4.1 | length 1139.2
  Top Layer w10: v1(3485,2350) 3665.3,2350 3671.3,2344 3688.7,2344 3689.7,2345 3760,2345 3775.25,2360.25 3775.25,2399.75 3790.51,2415 3847.74,2415 3870.02,2392.72 3917.76,2392.72 3929.49,2380.98 R9.1 R9.1@3934.74,2385.26 ; U1.1 3946.19,2455.97 3946.19,2454.69 3941.22,2449.72 3941.22,2391.73 R9.1@3934.74,2385.26 ; U4.1 3950,2358.5 3934.74,2373.76 R9.1@3934.74,2385.26
  Bottom Layer w10: P3.3 3485,2610 v1(3485,2350)
NetR1_1: R1.1 U1.51 | length 478.4
  Top Layer w10: R1.1 3427.76,2291.73 3427.76,2352.25 3412.27,2367.74 3412.27,2423.15 U1.51
NetR2_1: R2.1 U1.52 | length 332.5
  Top Layer w10: R2.1 3451.73,2406.73 3451.73,2434.77 U1.52
NetR5_1: R5.1 TP5.1 U1.31 U2.1 U3.4 | length 3980.4
  Top Layer w10: U1.31 4022.44,3061.16 4022.44,3162.44 TP5.1 ; v1(3950,6580) 3952.71,6580 3964.2,6591.5 3994.37,6591.5 U2.1 ; v1(4080,6230) 4080,6232.71 4085.12,6237.82 U3.4 ; v1(4090,3210) 4072.32,3192.32 4052.32,3192.32 TP5.1 ; R5.1 4120,3185 TP5.1
  Layer 2 w10: v1(3950,6580) 3940,6580 3915,6555 3915,6467.75 4080,6302.75 v1(4080,6230) 4080,6110 4032,6062 4032,3268 v1(4090,3210)
NetR6_1: R6.1 TP6.1 U1.32 U2.6 U3.2 | length 4285.4
  Top Layer w10: v1(3890,3270) 3907.68,3252.32 3907.68,3243.07 TP6.1@3950,3200.75 ; U1.32 3946.19,3012.75 3946.19,3181.19 TP6.1 TP6.1@3950,3200.75 ; v1(4025,6275) 4027.71,6275 4035.54,6282.83 4053.11,6282.83 4055,6284.72 U3.2 ; U2.6 4146.66,6594.37 4157.29,6605 v1(4160,6605) ; R6.1 4129.31,3239.31 4012.88,3239.31 3996.88,3223.31 3972.56,3223.31 TP6.1@3950,3200.75
  Layer 1 w10: v1(4025,6275) 4025,6305 3890,6440 3890,6555 3940,6605 v1(4160,6605)
  Layer 2 w10: v1(3890,3270) 4016,3396 4016,6075 4025,6084 v1(4025,6275)
NetR13_2: R13.2 U1.30 U2.4 | length 3815.7
  Top Layer w10: U1.30 4070,3080.88 v1(4070,3115) 4125,3115 R13.2 4130,3109.02 R13.2@4118.27,3097.28 ; U2.4 4107.13,6515.63 4110,6512.76 v1(4110,6465)
  Layer 1 w10: v1(4070,3115) 4111,3156 4111,3258.8 4090,3279.8 v1(4090,3340)
  Layer 2 w10: v1(4090,3340) 4064,3366 4064,5979 4210,6125 4210,6365 v1(4110,6465)
NetR14_2: R14.2 U1.29 U3.7 | length 3838
  Top Layer w10: U1.29 4021.96,3005 4070,3005 4105,2970 4244.49,2970 4246.77,2972.28 4247.76,2972.28 4259.49,2984.02 4255,2988.5 v1(4255,3040) ; U3.7 v1(4150,6305)
  Layer 2 w10: v1(4150,6305) 4150,6269.7 4180,6239.7 4180,6135 4048,6003 4048,3281.7 4111,3218.7 4111,3184 v1(4255,3040)
NetU1_21: U1.21
NetU1_22: U1.22
NetU1_23: U1.23
NetU1_39: U1.39 Y1.3 | length 134.5
  Top Layer w10: Y1.3 3654.63,3009.63 3654.63,2998.61 3657.42,2995.83 3657.42,2995.29 U1.39
NetU1_48: U1.48 Y2.1 | length 128
  Top Layer w10: Y2.1 3525,2877.16 U1.48
pads on no net: J1.5 J1.6 P1.6 U1.2 U1.4 U1.5 U1.6 U1.11 U1.12 U1.13 U1.14 U1.15 U1.16 U1.17 U1.18 U1.24 U1.27 U1.28 U1.33 U1.34 U1.36 U1.37 U1.40 U1.45 U1.46 U1.47 U1.49 U1.50 U1.53 U1.54 U1.55 U1.58 U1.59 U1.60 U1.61 U1.62 U1.63 U1.64 U6.5 Y2.3

## Polygon pours and split planes (outlines as drawn)
3V3DC on Layer 1 "Power-3V3DC" (solid, pour order 16): 3999.54,1925 3999.54,1300.46 4000,1300 3275,1300 3275,3350 4805,3350 4805,1300 4000,1300 4000,1924.54 3999.54,1925 4680,1925 4680,2146.24 4675,2151.24 4051.54,2151.24 4051.54,2453.46 4040,2465 4035,2460 3625,2460 3625,1925
5VDC on Layer 1 "Power-5VDC" (solid, pour order 10): 3654.86,2119.27 3654.86,1939.27 4659.86,1939.27 4659.86,2119.27
3V3DC on Layer 1 "Power-3V3DC 1" (solid, pour order 18): 3750,6830 3750,3400 4325,3400 4325,6830
5VDC on Layer 1 "Power-5VDC 1" (solid, pour order 12): 3661.18,2115.58 3661.18,2425.58 4011.18,2425.58 4011.18,2115.58
GND on Layer 2 "Layer 2-GND" (solid, pour order 14): 3275,1300 4800,1300 4800,3350 3275,3350
GND on Layer 2 "Ground-GND 1" (solid, pour order 20): 3750,3400 4325,3400 4325,6830 3750,6830
GND on Top Layer "Top Layer-GND" (solid, pour order 4): 3477.34,2756.38 3264.26,2969.46 3664.26,3369.46 3877.34,3156.38

## Silkscreen, mask and mechanical layers (free items; w line width, h text height)
Top Overlay:
  region: 18874 vertices and 1758 holes, not listed, extent 4331.09,1310.99 4542.33,1521.94
  text "SCL" at 3925,3260 h30
  text "SDA" at 4025,3260 h30
  text "GND" at 4565,3260 h30
  text "GND" at 3360,3185 h30
  text "UART" at 3310,2805 h25
  text "RX" at 3440,2725 h25
  text "TX" at 3440,2615 h25
  text "EN" at 3445,2515 h25
  text "3V3 EN" at 4235,2455 h25
  text "ICD" at 4695,2205 h25
  text "TERM EN" at 3369.15,2190 h25
  text "5V EN" at 4525,2175 h25
  text "GND" at 4560,1825 h30
  text "VEN2" at 4540,1735 h25 r90
  text "VEN1" at 4245,1730 h25 r90
  text "GND" at 3390,1450 h30
  text "ESU v1.0" at 4560,1450 h30
  text "GND" at 3600,1345 h30
  text "A" at 3795,1345 h30
  text "B" at 3965,1345 h30
  text "+V" at 4075,1345 h30
Mechanical 15:
  the board outline again, w7.87